# Altium PCB SPARKy watch PCB blank.PcbDoc (part 1 of 2)
Units mm, origin at the board's own origin, x right, y up, seen from the top; angles counter-clockwise.
Board outline 67 x 34.75 mm, 2 copper layers (Component Side, Bottom Layer), stack 0.325 mm thick; 94 components, 71 nets, 348 pads, 22 vias.
Unrouted connection lines stored in the file: 142.
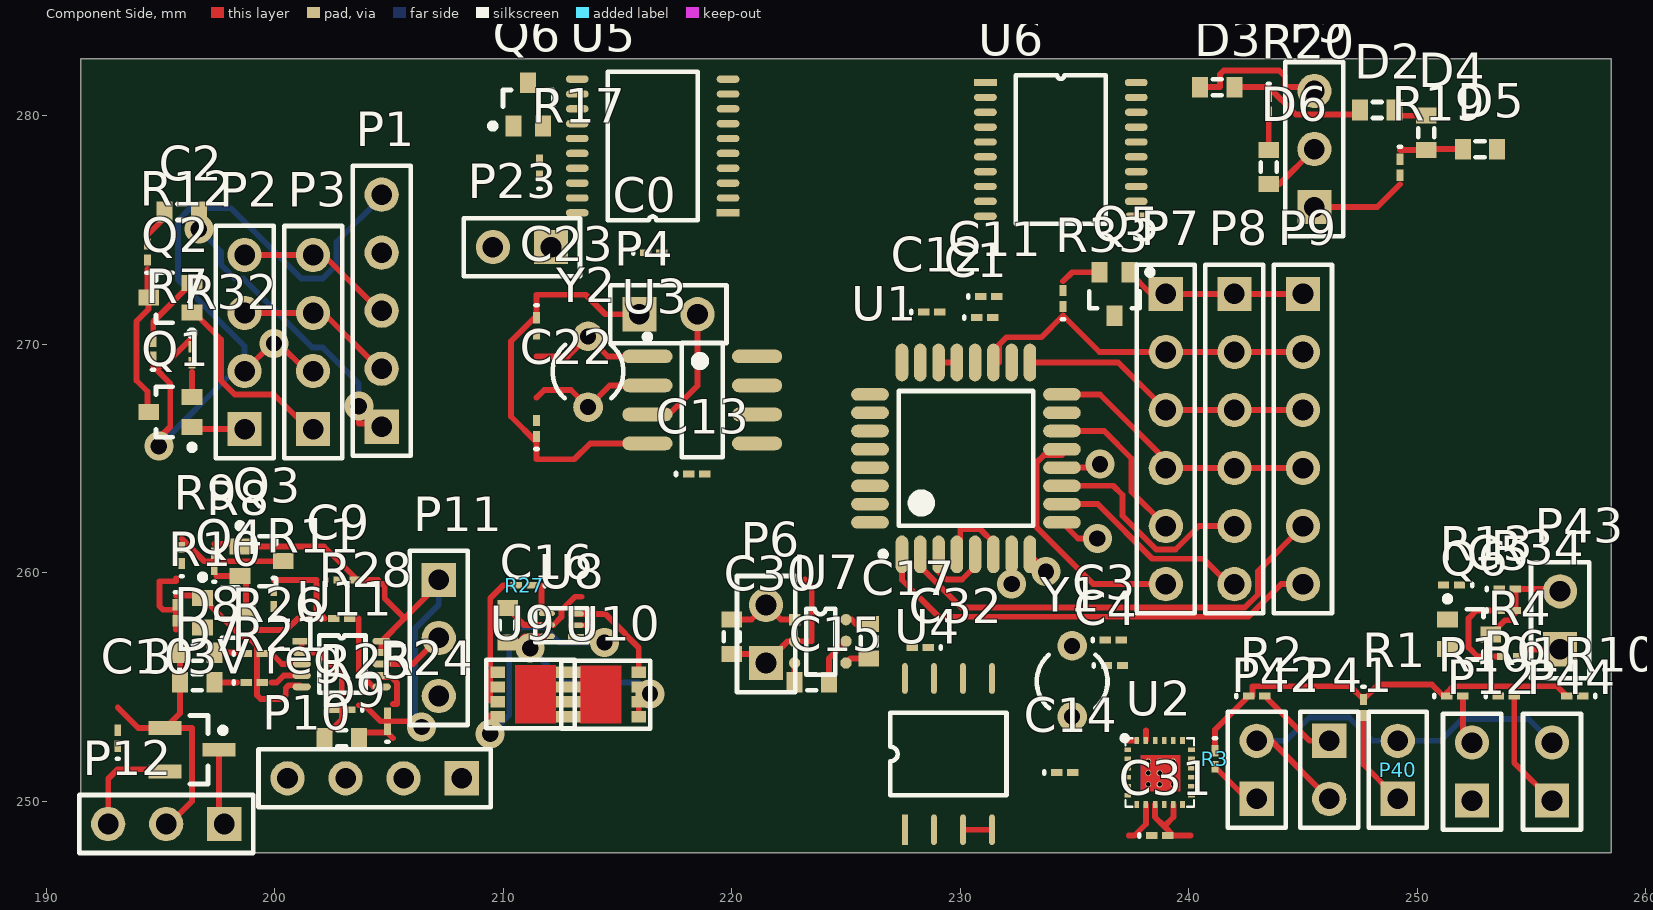
[diagram p0: Component Side view]
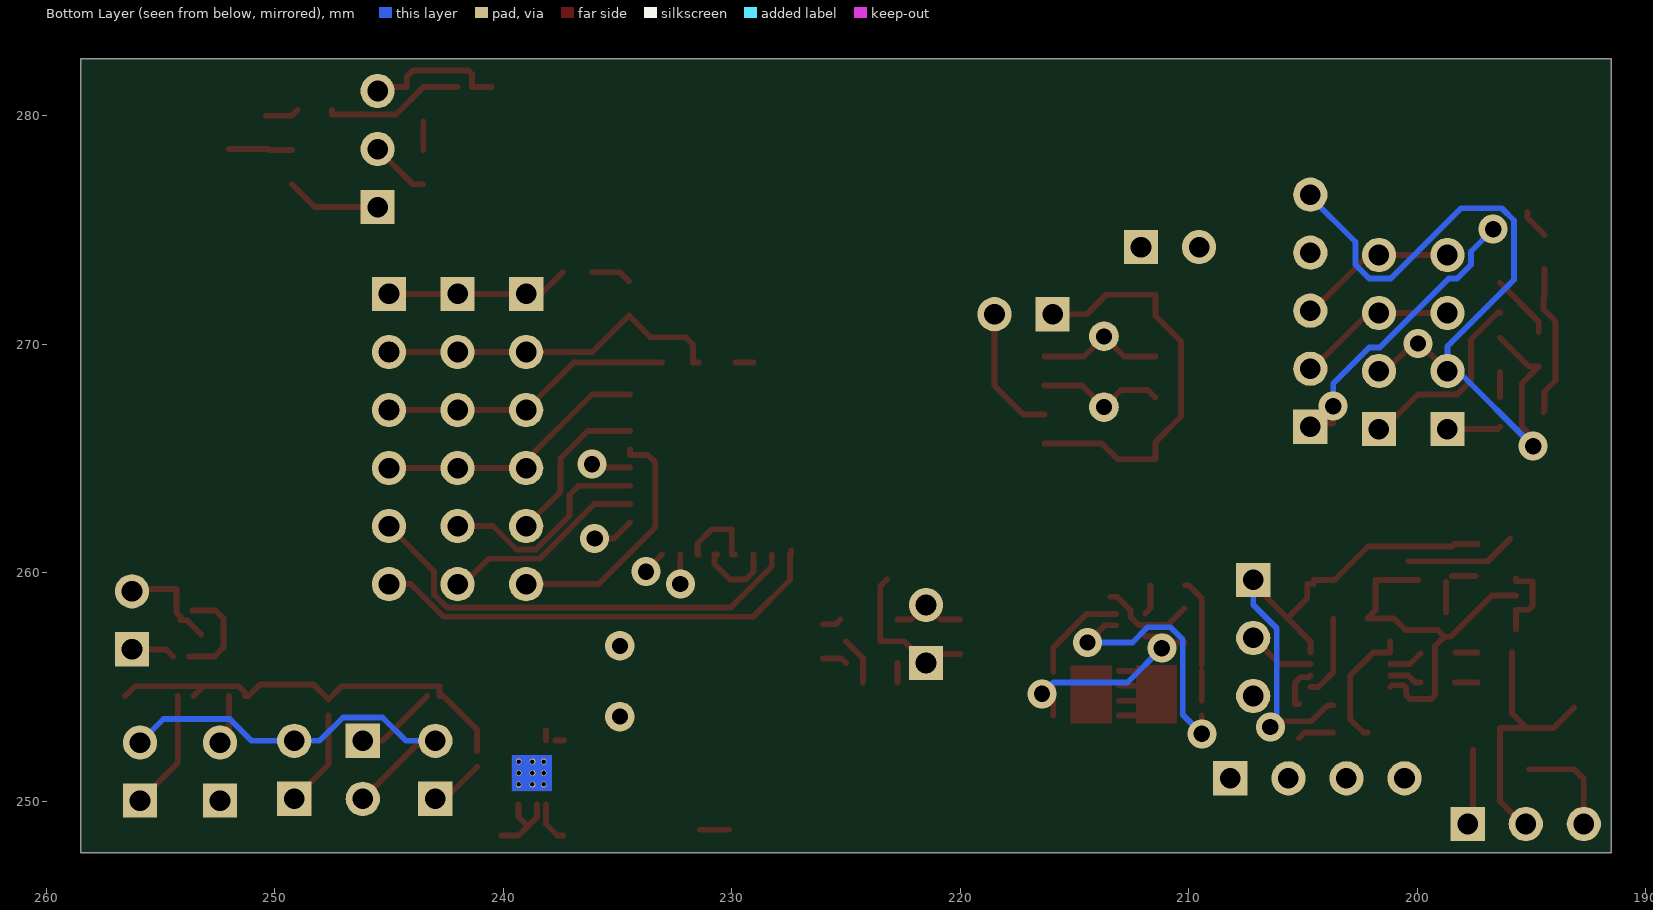
[diagram p1: Bottom Layer view, seen from below]

## Layer stack, top to bottom
Top Solder: solder mask 0.0102, Solder Resist, Dk 3.5
Component Side: signal copper 0.0356
Dielectric 1: core 0.254, FR-4, Dk 4.2
Bottom Layer: signal copper 0.0356
Solder Side: solder mask 0.0102, Solder Resist, Dk 3.5

## Board outline
191.5,247.75 191.5,282.5 258.5,282.5 258.5,247.75

## Design rules (kind name [scope] priority, off if disabled: settings)
AcuteAngle [All] p1: minimum=9.00000000000000E+0001 checktracksonly=FALSE
AssemblyTestpoint [All] p1: testpointundercomponent=TRUE minsize=1 maxsize=2.5 preferedsize=1.5 minholesize=0 maxholesize=1 preferedholesize=0.8 testpointgrid=0.025 usegrid=TRUE gridtolerance=0 allowsidetop=TRUE allowsidebottom=TRUE
Clearance "Clearance Ceramic to Board" [InComponentClass('Ceramic') vs ((ObjectKind = 'Arc') Or (ObjectKind = 'Track')) And (Layer = 'KeepOutLayer') And (Keepout = 'False')] p1: gap=4.95 // Ceramic component to board outline
Clearance [All] p2: gap=0.15
ComponentClearance [All] p1: gap=0.25 collisioncheckmode=3 verticalgap=0.25 showdistances=FALSE
DiffPairsRouting [All] p1: maxlimit=0.1 minlimit=0.1 mostfreqgap=0.1 toplayer_minwidth=0.15 toplayer_maxwidth=0.15 toplayer_prefwidth=0.15 bottomlayer_minwidth=0.15 bottomlayer_maxwidth=0.15 bottomlayer_prefwidth=0.15 maxuncoupledlength=12.7
FabricationTestpoint [All] p1: side=3 testpointundercomponent=TRUE minsize=1 maxsize=2.5 preferedsize=1.5 minholesize=0 maxholesize=1 preferedholesize=0.8 testpointgrid=0.025 allowsidetop=TRUE allowsidebottom=TRUE usegrid=TRUE gridtolerance=0
Height [All] p1: minheight=0 maxheight=50 prefheight=12.5
HoleSize [All] p1: absolutevalues=TRUE maxlimit=6.5 minlimit=0.3 maxpercent=80.000 minpercent=20.000
HoleToHoleClearance [All] p1: gap=0.25 allowstackedmicrovias=TRUE
MinimumAnnularRing [All] p1: minimumring=0.15
MinimumSolderMaskSliver [All] p1: minsoldermaskwidth=0.15
PlaneClearance [All] p1: clearance=0.5
PlaneConnect [All] p1: planeconnectstyle=Relief reliefexpansion=0.5 reliefentries=4 reliefconductorwidth=0.25 reliefairgap=0.25
PolygonConnect [All] p1: connectstyle=Relief reliefconductorwidth=0.25 reliefentries=4 polygonreliefangle="90 Angle" airgapwidth=0.25
RoutingCorners [All] p1: cornerstyle=45-Degree minsetback=2.5 maxsetback=2.5
RoutingVias [All] p1: holewidth=0.5 width=0.8 viastyle="Through Hole" minholewidth=0.3 minwidth=0.6 maxholewidth=0.7 maxwidth=1
SilkToSilkClearance [All] p1: silktosilkclearance=0.25
SilkToSolderMaskClearance [IsPad] p1: minsilkscreentomaskgap=0.25 clearancetoexposedcopper=TRUE
SolderMaskExpansion [All] p1: expansion=0.075
UnpouredPolygon [All] p1: allowunpoured=FALSE
Width [All] p1: maxlimit=1 minlimit=0.15 preferedwidth=0.2
16 further rules are at their usual default settings.

## Classes and differential pairs
component class "V stuff": R21 R24 R25 R26 R27 R28 U8 U9 U10 U11
component class "Serial devices": R7 R32
component class Screens: R33
component class RTC: U2 U3 U4 Y2
component class Prefrels: R17 R19 R20 U5 U7
component class Designator: R12 R13 U1 Y1
component class "battery sensor": R8 R9 R10 R11

## Components (designator, comment, footprint, x,y, rotation, side; value= is the part's Value field where it differs from the comment)
"3.3V reg" "Volt Reg" SOT23_M 196.377,252.25 r0 top
C0 "Cap Semi" 0603 216.589,274 r0 top
C1 "Cap Semi" 0603 231.075,271.161 r0 top
C2 "Cap" J1-0603 195.927,275.784 r180 top
C3 "Cap Semi" 0603 236.7,257.05 r0 top
C4 "Cap Semi" 0603 236.75,255.943 r0 top
C5 "Cap Semi" 0603 253.949,258.343 r0 top
C9 "Cap Semi" 0603 203.177,259.682 r0 top
C10 "Cap Semi" 0603 193.127,252.75 r90 top
C11 "Cap Semi" 0603 231.25,272.084 r0 top
C12 "Cap Semi" 0603 228.75,271.411 r0 top
C13 "Cap Semi" 0603 218.46,264.311 r0 top
C14 "Cap Semi" 0603 234.579,251.25 r0 top
C15 "Cap" J1-0603 223.5,255.196 r0 top
C16 "Cap" J1-0603 210.187,257.696 r90 top
C17 "Cap" J1-0603 226,256.995 r90 top
C22 "Cap" 0603 211.46,266.311 r90 top
C23 "Cap" 0603 211.46,270.811 r270 top
C30 "C16" J1-0603 220,257.196 r270 top
C31 "Cap Semi" 0603 238.725,248.5 r0 top
C32 "Cap Semi" 0603 228.25,256.721 r180 top
D2 "Diode" J1-0603 248.25,280.25 r0 top
D3 "Diode" J1-0603 241.25,281.25 r0 top
D4 "Diode" J1-0603 250.399,279.25 r90 top
D5 "Diode" J1-0603 252.75,278.54 r180 top
D6 "de ??" J1-0603 243.5,277.75 r270 top
D7 "FULL" J1-0603 196.602,255.196 r0 top
D8 "Chargeing" J1-0603 196.602,256.5 r0 top
D9 "power ok" J1-0603 202.927,252.75 r0 top
P1 "FTDI headder" HDR1X5 204.677,266.384 r90 top
P2 "ESP8266" HDR1X4 198.677,266.284 r90 top
P3 "RN42-1/rm" HDR1X4 201.676,266.284 r90 top
P4 "Header 2" HDR1X2 215.96,271.311 r0 top
P5 "External Port" HDR1X3 245.5,276 r90 top
P6 "Header Lasar" HDR1X2 221.5,256.045 r90 top
P7 "Screen 1" HDR1X6 239,272.199 r270 top
P8 "Screen 2" HDR1X6 242,272.199 r270 top
P9 "Screen 3" HDR1X6 245,272.199 r270 top
P10 "USB" HDR1X4 208.177,251 r180 top
P11 "battery header" HDR1X3 207.177,259.682 r270 top
P12 "V rails" HDR1X3 197.787,249 r180 top
P12 "Buzzer" HDR1X2 252.399,250.024 r90 top
P23 "LED conector" HDR1X2 212.089,274.25 r180 top
P40 "SW1 (enter)" HDR1X2 249.149,250.099 r90 top
P41 "SW2 (Escape)" HDR1X2 246.149,252.639 r270 top
P42 "SW3" HDR1X2 242.974,250.099 r90 top
P43 "SW4" HDR1X2 256.25,256.643 r90 top
P44 "SW5" HDR1X2 255.899,250.024 r90 top
Q1 "2N7000" ONSC-SOT-323-3-419-04_V 195.427,267.034 r180 top
Q2 "2N7000" ONSC-SOT-323-3-419-04_V 195.427,272.034 r180 top
Q3 "MESFET-N" ONSC-SOT-323-3-419-04_V 199.427,260.5 r0 top
Q4 "MESFET-P" ONSC-SOT-323-3-419-04_V 197.787,258.25 r0 top
Q5 "2N7000" ONSC-SOT-323-3-419-04_V 236.75,272.199 r270 top
Q6 "2N7000" ONSC-SOT-323-3-419-04_V 211.089,280.5 r90 top
Q6 "2N7000" ONSC-SOT-323-3-419-04_V 252.275,257.3 r0 top
R1 "Res1" 0603 247.649,254.099 r270 top
R2 "Res1" 0603 242.974,254.599 r0 top
R3 "Res1" 0603 241.149,251.849 r270 top
R4 "Res1" 0603 254.099,256.33 r0 top
R6 "Res1" 0603 253.899,254.599 r0 top
R7 "Res3" 0603 194.677,269.784 r90 top
R8 "Res3" 0603 197.352,260.5 r90 top
R9 "Res3" 0603 195.928,260.75 r90 top
R10 "Res3" 0603 195.677,258.25 r270 top
R11 "Res11" 0603 199.953,258.868 r270 top
R12 "Res1" 0603 194.427,274.034 r90 top
R13 "Res1" 0603 251.5,259.459 r180 top
R17 "Res1" 0603 211.589,277.7 r90 top
R19 "Res1" 0603 249.25,277.75 r270 top
R20 "Res1" 0603 243.5,280.5 r270 top
R21 "Res1" 0603 199.102,255.196 r0 top
R24 "Res1" 0603 204.927,253.5 r90 top
R25 "Res1" 0603 202.927,254 r180 top
R26 "Res1" 0603 199.102,256.466 r0 top
R27 "Res1" 0603 210.927,259.446 r180 top
R28 "Res1" 0603 202.927,258 r0 top
R32 "Res3" 0603 196.377,269.534 r270 top
R33 "Res3" 0603 234.5,272 r90 top
R34 "Res1" 0603 253.949,259.284 r0 top
R100 "Res1" 0603 256.899,254.599 r180 top
R101 "Res1" 0603 251.649,254.599 r0 top
U1 "ATmega8-16AU" 32A_N 230.25,265 r90 top
U2 "Component_1" MPU-9255 237.328,252.249 r0 top
U3 "MCP79412T-I/SN" SOIC-SN8_N 218.709,267.56 r0 top
U4 "Component_1" SOP8 227.579,248.75 r90 top
U5 "Component_1" SOP20 219.839,275.75 r180 top
U6 "Component_1" SOP20 231.1,281.45 r0 top
U7 "LTC3200" SOP6 222.749,257.945 r0 top
U8 "bq29700" DSE 213.177,257.196 r180 top
U9 "CSD16406Q3" Q3 209.75,255.646 r0 top
U10 "CSD16406Q3" Q3 215.927,253.696 r180 top
U11 "MCP73833/4" SOP10 201.177,257 r0 top
Y1 "16MHz" R38 234.899,255.25 r0 top
Y2 "32.768Mhz" R38 213.71,268.794 r180 top

## Footprints (in the part's own frame and the unit in brackets; to place one, negate y for a bottom-side part, rotate by r counter-clockwise, add the part's x,y. Pads: shape width x height; smd on the part's side, far side on the other; paste and mask are expansions set on the pad)
32A_N [mm] "Thin QFP, 32-Leads, Body 7x7mm, Pitch 0.8mm, IPC Medium Density"
  oval 1.65x0.55 smd: 1(-4.2,2.8) 2(-4.2,2) 3(-4.2,1.2) 4(-4.2,0.4) 5(-4.2,-0.4) 6(-4.2,-1.2) 7(-4.2,-2) 8(-4.2,-2.8) 17(4.2,-2.8) 18(4.2,-2) 19(4.2,-1.2) 20(4.2,-0.4) 21(4.2,0.4) 22(4.2,1.2) 23(4.2,2) 24(4.2,2.8)
  oval 0.55x1.65 smd: 9(-2.8,-4.2) 10(-2,-4.2) 11(-1.2,-4.2) 12(-0.4,-4.2) 13(0.4,-4.2) 14(1.2,-4.2) 15(2,-4.2) 16(2.8,-4.2) 25(2.8,4.2) 26(2,4.2) 27(1.2,4.2) 28(0.4,4.2) 29(-0.4,4.2) 30(-1.2,4.2) 31(-2,4.2) 32(-2.8,4.2)
  silkscreen extent -4.32,-2.95 2.95,3.75, body extent -3.5,-3.5 3.5,3.5, height 1.2
0603 [mm] "Chip Inductor, Body 0.6x0.3mm, IPC High Density"
  rect 0.5x0.3 smd: 1(-0.35,0) 2(0.35,0)
  silkscreen extent -0.9,-0.05 -0.9,0.05, body extent -0.33,-0.18 0.33,0.18, height 0.55
DSE [mm]
  rect 0.7x0.23 smd: 1(0,0)
  oval 0.7x0.23 smd: 2(0,-0.5) 3(0,-1) 4(1.27,-1.016) 5(1.27,-0.516) 6(1.27,-0.016)
  silkscreen extent -0.51,-1.25 1.78,0.25
HDR1X2 [mm] "Connector; Header; 2 Position"
  rect 1.5x1.5 hole 0.9: 1(0,0)
  round 1.5 hole 0.9: 2(2.54,0)
  silkscreen extent -1.27,-1.27 3.81,1.27
HDR1X3 [mm] "Connector; Header; 3 Position"
  rect 1.5x1.5 hole 0.9: 1(0,0)
  round 1.5 hole 0.9: 2(2.54,0) 3(5.08,0)
  silkscreen extent -1.27,-1.27 6.35,1.27
HDR1X4 [mm] "Connector; Header; 4 Position"
  rect 1.5x1.5 hole 0.9: 1(0,0)
  round 1.5 hole 0.9: 2(2.54,0) 3(5.08,0) 4(7.62,0)
  silkscreen extent -1.27,-1.27 8.89,1.27
HDR1X5 [mm] "Connector; Header; 5 Position"
  rect 1.5x1.5 hole 0.9: 1(0,0)
  round 1.5 hole 0.9: 2(2.54,0) 3(5.08,0) 4(7.62,0) 5(10.16,0)
  silkscreen extent -1.27,-1.27 11.43,1.27
HDR1X6 [mm] "Connector; Header; 6 Position"
  rect 1.5x1.5 hole 0.9: 1(0,0)
  round 1.5 hole 0.9: 2(2.54,0) 3(5.08,0) 4(7.62,0) 5(10.16,0) 6(12.7,0)
  silkscreen extent -1.27,-1.27 13.97,1.27
J1-0603 [mm] "Chip Resistor, Body 1.6x0.8mm, IPC High Density"
  rect 0.7x0.9 smd: 1(-0.75,0) 2(0.75,0)
  silkscreen extent -0.2,-0.35 0.2,0.35, body extent -0.85,-0.48 0.85,0.48, height 0.9
MPU-9255 [mm]
  rect 0.3x0.2 smd: 1(0,0) 2(0,-0.4) 3(0,-0.8) 4(0,-1.2) 5(0,-1.6) 6(0,-2) 13(2.8,-2) 14(2.8,-1.6) 15(2.8,-1.2) 16(2.8,-0.8) 17(2.8,-0.4) 18(2.8,0)
  rect 0.2x0.3 smd: 7(0.4,-2.4) 8(0.8,-2.4) 9(1.2,-2.4) 10(1.6,-2.4) 11(2,-2.4) 12(2.4,-2.4) 19(2.4,0.4) 20(2,0.4) 21(1.6,0.4) 22(1.2,0.4) 23(0.8,0.4) 24(0.4,0.4)
  Component Side region: 0.552,-1.817 2.302,-1.817 2.302,-0.227 0.552,-0.227
  Bottom Layer region: 0.549,-1.812 2.299,-1.812 2.299,-0.222 0.549,-0.222
  silkscreen extent -0.23,-2.5 2.9,0.61
ONSC-SOT-323-3-419-04_V [mm] "SOT23, 3-Leads, Body 2x1.25mm, Pitch 0.65mm"
  rect 0.9x0.7 smd: 1(-0.95,0.65) 2(-0.95,-0.65) 3(0.95,0)
  silkscreen extent -1.08,-1.1 0.63,1.67, body extent -0.63,-1 0.63,1, height 1
Q3 [mm]
  rect 0.63x0.5 smd: 1(0,0) 2(0,-0.65) 3(0,-1.3) 4(0,-1.95) 5(2.87,-1.95) 6(2.87,-1.3) 7(2.87,-0.65) 8(2.87,0)
  Component Side region: 0.76,-2.246 2.56,-2.246 2.56,0.304 0.76,0.304
  silkscreen extent -0.5,-2.45 3.38,0.53
R38 [mm] "Crystal, Thru-Hole; 2 Leads; Body 3.1 x 8.2 mm (Dia.xH)"
  round 1.3 hole 0.7: 1(0,1.55) 2(0,-1.55)
  silkscreen extent -1.55,-1.19 1.55,1.17
SOIC-SN8_N [mm] "SOIC, 8-Leads, Body 4.9x3.8mm, Pitch 1.27mm, IPC Medium Density"
  oval 2.2x0.6 smd: 1(-2.4,1.905) 2(-2.4,0.635) 3(-2.4,-0.635) 4(-2.4,-1.905) 5(2.4,-1.905) 6(2.4,-0.635) 7(2.4,0.635) 8(2.4,1.905)
  silkscreen extent -2.52,-2.5 0.9,2.88, body extent -2,-2.5 2,2.5, height 1.75
SOP6 [mm]
  rect 0.5x0.5 smd: 1(0,0)
  round 0.5 smd: 2(0,-0.95) 3(0,-1.9) 4(2.25,-1.9) 5(2.25,-0.95) 6(2.25,0)
  silkscreen extent 0.51,-2.41 1.78,0.48
SOP8 [mm]
  rect 1.345x0.25 smd: 1(0,0)
  oval 1.345x0.25 smd: 2(0,-1.27) 3(0,-2.54) 4(0,-3.81) 5(6.62,-3.81) 6(6.62,-2.54) 7(6.62,-1.27) 8(6.62,0)
  silkscreen extent 1.51,-4.45 5.11,0.64
SOP10 [mm]
  rect 0.8x0.3 smd: 1(0,0)
  oval 0.8x0.3 smd: 2(0,-0.5) 3(0,-1) 4(0,-1.5) 5(0,-2) 6(3.5,-2) 7(3.5,-1.5) 8(3.5,-1) 9(3.5,-0.5) 10(3.5,0)
  silkscreen extent 0.76,-2.25 2.79,0.25
SOP20 [mm]
  rect 1x0.32 smd: 1(0,0)
  oval 1x0.32 smd: 2(0,-0.65) 3(0,-1.3) 4(0,-1.95) 5(0,-2.6) 6(0,-3.25) 7(0,-3.9) 8(0,-4.55) 9(0,-5.2) 10(0,-5.85) 11(6.6,-5.85) 12(6.6,-5.2) 13(6.6,-4.55) 14(6.6,-3.9) 15(6.6,-3.25) 16(6.6,-2.6) 17(6.6,-1.95) 18(6.6,-1.3) 19(6.6,-0.65) 20(6.6,0)
  silkscreen extent 1.34,-6.17 5.26,0.33
SOT23_M [mm] "SOT23, 3-Leads, Body 2.9x1.3mm, Pitch 0.95mm, Lead Span 2.3mm - Reverse Pinning, IPC Low Density"
  rect 1.45x0.6 smd: 1(1.175,0) 2(-1.175,-0.95) 3(-1.175,0.95)
  silkscreen extent -0.1,-1.5 1.48,1.5, body extent -0.7,-1.5 0.7,1.5, height 1.1

## Part data
"3.3V reg": "Voltage Regulator"
C0 C1 C3 C4 C5 C9 C10 C11 C12 C13 C14 C31 C32: "Capacitor (Semiconductor SIM Model)"
C2 C15 C16 C17 C22 C23: "Capacitor"
C30: library part Cap, "Capacitor"
D2 D3 D4 D5: "Default Diode"
D6: library part Diode, "Default Diode"
D7 D8 D9: library part LED1, "Typical RED GaAs LED"
P1: library part "Header 5", "Header, 5-Pin"
P2 P3 P10: library part "Header 4", "Header, 4-Pin"
P4: "Header, 2-Pin"
P5 P11 P12: library part "Header 3", "Header, 3-Pin"
P6 P12 P23 P40 P41 P42 P43 P44: library part "Header 2", "Header, 2-Pin"
P7 P8 P9: library part "Header 6", "Header, 6-Pin"
Q1 Q2 Q5 Q6 Q6: "Small Signal MOSFET, 200 mA, 60 V, N-Channel, 3-Pin TO-92, Bulk Box"
Q3: "N-Channel MESFET"
Q4: "P-Channel MESFET"
R1 R2 R3 R4 R6 R7 R8 R9 R10 R12 R13 R17 R19 R20 R21 R24 R25 R26 R27 R28 R32 R33 R34 R100 R101: "Resistor"
R11: library part Res3, "Resistor"
U1: "8-bit AVR Microcontroller, 4.5-5.5V, 16MHz, 8KB Flash, 512 Bytes EEPROM, 1KB SRAM, 32-pin TQFP, Industrial Grade (-40°C to 85°C)"
U3: "I2C Real-Time Clock/Calendar with EEPROM, SRAM, Unique ID and Battery Switchover, 8-Pin SOIC, Industrial Temperature, Tape and Reel"
U7 U8 U9 U10 U11: library part Component_1
Y1 Y2: library part XTAL, "Crystal Oscillator"

## Via types
v1: diameter 1.27, hole 0.711, Component Side to Bottom Layer, 13 vias
v2: diameter 0.25, hole 0.2, Component Side to Bottom Layer, 9 vias

## Nets (pads, with @x,y where several pads share a name; then routed paths per layer and width w, separated by ;. In a path a pad name is that pad's centre, name@x,y a point inside that pad or via, vN(x,y) a via of type N, cw(c..) or ccw(c..) an arc to the next point about the centre after c; other vN are vias at no path point)
3.3V: "3.3V reg.3" C0.2 C5.2 C10.2 C11.2 C12.2 C13.2 C31.1 C32.2 D7.1 D8.1 P12.2@195.247,249 P40.2 P41.2 P42.2 P43.2 P44.2 Q1.3 Q2.3 Q6.3@253.225,257.3 R12.1 R13.2 R34.2 U1.4 U1.6 U1.18 U2.1 U2.8 U2.13 U2.22 U3.8 U4.8 U5.5 U6.5 U6.6 | length 47.4
  Component Side w0.254: 193.127,254.1 194.027,253.2 195.202,253.2 ; 194.427,273.284 194.427,272.084 Q2.3@194.477,272.034 194.477,271.526 193.95,270.999 193.95,268.407 194.427,267.93 194.427,267.084 Q1.3@194.477,267.034 ; P12.2@195.247,249 195.377,249 196.377,250 196.377,253.2 195.202,253.2 ; D8.1@195.852,256.5 D7.1@195.852,255.196 195.852,253.85 195.202,253.2 ; U1.4@229.85,260.8 229.998,260.8 229.998,261.902 230.879,261.902 231.5,261.281 231.5,260.8 U1.6@231.45,260.8 ; 237.375,248.5 237.628,248.5 238.128,249 U2.8@238.128,249.849 ; P42.2@242.974,252.639 243.609,252.639 P41.2@246.149,250.099 ; Q6.3@253.225,257.3 253.841,257.916 254.124,257.916 254.124,258.076 254.299,258.251 C5.2@254.299,258.343 R34.2@254.299,259.284 256.149,259.284 P43.2@256.25,259.183
  Bottom Layer w0.254: P42.2@242.974,252.639 244.257,252.639 245.284,253.666 247.014,253.666 248.041,252.639 P40.2@249.149,252.639 251.022,252.639 251.974,253.591 254.872,253.591 P44.2@255.899,252.564
GND: "3.3V reg.2" C0.1 C1.1 C3.1 C4.1 C5.1 C9.1 C10.1 C11.1 C12.1 C13.1 C14.1 C22.1 C23.1 C30.2 C31.2 C32.1 D3.1 D5.1 P1.5 P2.2 P3.2 P4.1 P5.3 P6.1 P7.2 P8.2 P9.2 P10.1 P12.3 P23.2 Q4.1 R1.1 R2.1 R3.1 R4.1 R6.1 R7.1 R10.1 R11.1 R17.1 R27.2 R28.1 R32.1 R33.1 R100.2 R101.1 U1.3 U1.5 U1.19 U1.21 U1.22 U2.9 U2.11 U2.18 U2.20 U3.4 U4.3 U4.4 U4.7 U5.6 U5.7 U5.9 U5.15 U6.7 U6.9 U6.13 U7.2 U9.1 U9.2 U9.3 U11.5 | length 140.9
  Component Side w0.254: P12.3@192.707,249 192.707,250.98 193.127,251.4 195.102,251.4 ; v1(194.927,265.534) 194.927,265.884 195.427,266.384 195.427,268.284 194.677,269.034 195.127,269.034 196.377,270.284 ; 195.677,259 Q4.1@196.737,259 ; Q4.1@196.837,258.9 198.544,257.193 198.817,257.193 ; P2.2@198.677,268.824 199.887,270.034 200.177,270.034 201.387,268.824 P3.2@201.676,268.824 ; 199.953,259.682 201.827,259.682 ; U11.5@201.177,255 201.104,255.073 200.608,255.073 200.479,254.944 200.479,254.632 200.317,254.469 199.387,254.469 199.225,254.632 199.225,256.785 198.817,257.193 ; 201.826,259.5 201.826,258.351 202.177,258 201.027,258 200.518,257.491 199.114,257.491 198.817,257.193 ; 209.427,254.396 209.427,255.696 ; 209.427,255.946 209.427,258.879 209.995,259.446 210.177,259.446 ; P4.1@215.96,271.311 214.46,271.311 213.61,272.161 211.46,272.161 211.46,271.253 210.333,270.126 210.333,266.834 211.46,265.707 211.46,264.961 213.11,264.961 213.804,265.655 U3.4@216.309,265.655 ; C30.2@220,256.446 221.099,256.446 P6.1@221.5,256.045 222.45,256.995 U7.2@222.749,256.995 223.5,256.995 223.5,259.406 223.21,259.696 ; U1.3@229.05,260.8 229.05,260.041 229.393,259.698 230.079,259.698 230.75,260.369 230.75,260.8 U1.5@230.65,260.8 ; U1.22@229.05,269.2 U1.21@229.85,269.2 ; U4.3@230.119,248.75 U4.4@231.389,248.75 ; U1.19@231.45,269.2 231.698,269.2 231.698,269.979 232.021,270.302 233.552,270.302 234.5,271.25 236.091,269.659 P7.2@239,269.659 P8.2@242,269.659 P9.2@245,269.659 ; U2.9@238.528,249.849 238.528,249.301 238.928,248.9 ; U2.11@239.328,249.849 239.328,249.304 238.928,248.904 238.928,248.9 ; 240.075,248.5 239.329,248.5 238.928,248.9 ; D3.1@240.5,281.25 241.373,281.25 241.373,281.815 241.535,281.977 243.965,281.977 244.227,281.715 244.227,281.25 245.33,281.25 P5.3@245.5,281.08 ; R3.1@241.149,252.199 241.149,253.124 R2.1@242.624,254.599 242.797,254.599 242.797,255.026 247.072,255.026 R1.1@247.649,254.449 248.299,255.099 250.649,255.099 251.149,254.599 R101.1@251.299,254.599 251.299,254.749 251.576,255.026 253.122,255.026 ; R6.1@253.549,254.599 253.122,255.026 ; C5.1@253.599,258.343 252.592,258.343 252.25,258.001 252.25,256.721 252.641,256.33 R4.1@253.749,256.33 ; R100.2@256.549,254.599 256.122,255.026 253.122,255.026
  Bottom Layer w0.254: v1(194.927,265.534) 198.217,268.824 P2.2@198.677,268.824 198.677,269.912 195.765,272.824 195.765,275.412 196.299,275.946 198.087,275.946 201.157,272.877 202.102,272.877 202.703,273.478 202.703,274.47 P1.5@204.677,276.444
  other v1: 199.964,270.034
NetC1_2: C1.2 U1.20
NetC2_1: C2.1 P1.1 | length 13.7
  Component Side w0.254: 203.677,266.534 204.426,266.534 v1(203.677,267.284) 203.677,266.534
  Bottom Layer w0.254: v1(196.677,275.034) 197.65,274.061 197.65,273.479 198.252,272.877 198.616,272.877 201.643,269.851 202.102,269.851 203.677,268.276 v1(203.677,267.284)
NetC2_2: C2.2 R12.2 U1.29 | length 1.3
  Component Side w0.254: 194.427,274.784 195.177,275.534 C2.2@195.177,275.784
NetC3_2: C3.2 U1.8 Y1.1 | length 1
  Component Side w0.254: U1.8@233.05,260.8 233.75,260.1 v1(233.75,260.041)
NetC4_2: C4.2 U1.7 Y1.2 | length 1.3
  Component Side w0.254: v1(232.25,259.5) U1.7@232.25,260.8
NetC14_2: C14.2 U2.10
NetC15_1: C15.1 U5.17 U7.3 | length 0.8
  Component Side w0.254: C15.1@222.75,255.196 U7.3@222.749,256.045
NetC16_1: C16.1 P11.3 U8.6 U10.1 U10.2 U10.3 | length 9.2
  Component Side w0.254: C16.1@210.187,256.946 210.677,256.946 210.943,257.212 U8.6@211.907,257.212 ; U10.1@215.927,253.746 U10.3@215.927,254.996 U10.3@215.927,255.046
  Bottom Layer w0.254: v1(211.177,256.696) 212.677,255.196 215.927,255.196 v1(216.427,254.696)
NetC16_2: C16.2 R25.2 U8.5 | length 4.2
  Component Side w0.254: C16.2@210.187,258.446 210.921,257.712 U8.5@211.907,257.712 212.196,257.712 212.55,258.066 212.55,258.359 213.138,258.946 213.427,258.946
NetC17_1: C17.1 U7.4 | length 1.1
  Component Side w0.254: U7.4@224.999,256.045 225.199,256.245 C17.1@226,256.245
NetC17_2: C17.2 U7.6 | length 0.8
  Component Side w0.254: 225.25,257.946 225.451,257.745 C17.2@226,257.745
NetC22_2: C22.2 U3.2 Y2.1 | length 5.7
  Component Side w0.254: 211.46,267.661 211.792,267.993 212.961,267.993 Y2.1@213.71,267.244 214.661,268.195 U3.2@216.309,268.195
NetC23_2: C23.2 U3.1 Y2.2 | length 5.6
  Component Side w0.254: 211.46,269.461 212.827,269.461 Y2.2@213.71,270.344 214.589,269.465 U3.1@216.309,269.465
NetC30_1: C30.1 P6.2 U7.1 | length 3.3
  Component Side w0.254: C30.1@220,257.946 220.861,257.946 P6.2@221.5,258.585 222.14,257.945 U7.1@222.749,257.945
NetD2_1: D2.1 D3.2 R20.1 U1.9 | length 8
  Component Side w0.254: U1.9@234.45,262.2 235.15,261.5 v1(236,261.5) ; D3.2@242,281.25 243.5,281.25 244.697,280.053 247.5,280.053 D2.1@247.5,280.25
NetD4_1: D4.1 D5.2 R19.1 U1.26 | length 2.8
  Component Side w0.254: 249.25,278.5 250.25,278.5 250.29,278.54 D5.2@252,278.54
NetD6_1: D6.1 R20.2 | length 1.2
  Component Side w0.254: D6.1@243.5,278.5 243.5,279.75
NetD6_2: D6.2 P5.2 | length 2.6
  Component Side w0.254: D6.2@243.5,277 243.96,277 P5.2@245.5,278.54
NetD7_2: D7.2 R21.1 | length 1
  Component Side w0.254: D7.2@197.352,255.196 198.352,255.196
NetD8_2: D8.2 R26.1 | length 1
  Component Side w0.254: D8.2@197.352,256.5 198.318,256.5
NetD9_1: D9.1 P10.4 U11.1 U11.2 | length 5.6
  Component Side w0.254: U11.1@201.177,257 U11.2@201.177,256.5 201.927,256.5 202.927,255.5 202.927,253.575 202.352,253 D9.1@202.177,253
NetD9_2: D9.2 R24.1 | length 1.6
  Component Side w0.254: D9.2@203.677,253 204.927,253 205.177,252.75
NetP1_2: P1.2 P2.3 P3.3 U1.30 | length 7.1
  Component Side w0.254: P2.3@198.678,271.364 P3.3@201.676,271.364 202.137,271.364 P1.2@204.677,268.824
NetP1_3: P1.3 P2.4 P3.4 U1.31 | length 7.1
  Component Side w0.254: P2.4@198.677,273.904 P3.4@201.676,273.904 ; P3.4@201.676,273.904 202.137,273.904 P1.3@204.677,271.364
NetP2_1: P2.1 Q1.1 | length 2.3
  Component Side w0.254: Q1.1@196.377,266.384 196.477,266.284 P2.1@198.677,266.284
NetP3_1: P3.1 Q2.1 | length 8.5
  Component Side w0.254: Q2.1@196.377,271.384 196.469,271.384 197.65,270.203 197.65,268.399 198.252,267.797 199.964,267.797 201.478,266.284 P3.1@201.676,266.284
NetP4_2: P4.2 U3.3 | length 5.8
  Component Side w0.254: U3.3@216.309,266.925 217.241,266.925 218.5,268.184 P4.2@218.5,271.311
NetP5_1: P5.1 R19.2 | length 4.2
  Component Side w0.254: P5.1@245.5,276 248.25,276 249.25,277
NetP7_1: P7.1 P8.1 P9.1 Q5.1 | length 8
  Component Side w0.254: Q5.1@237.4,273.149 238.35,272.199 P7.1@239,272.199 P8.1@242,272.199 P9.1@245,272.199
NetP7_3: P7.3 P8.3 P9.3 U1.17 U4.6 | length 12.8
  Component Side w0.254: U1.17@233.05,269.2 236.919,269.2 P7.3@239,267.119 P9.3@245,267.119
NetP7_4: P7.4 P8.4 P9.4 U1.16 U4.5 | length 12.1
  Component Side w0.254: U1.16@234.45,267.8 236.119,267.8 239,264.919 P7.4@239,264.579 P8.4@242,264.579 P9.4@245,264.579
NetP7_5: P7.5 U1.14 | length 7.1
  Component Side w0.254: U1.14@234.45,266.2 236.3,266.2 237.5,265 237.5,263.539 P7.5@239,262.039
NetP7_6: P7.6 U1.13 | length 11.2
  Component Side w0.254: U1.13@234.45,265.4 234.45,265.152 233.671,265.152 233.348,264.829 233.348,261.971 235.821,259.499 P7.6@239,259.499
  Bottom Layer w0.254: P7.6@239,259.499 P7.6@239.222,259.499
NetP8_5: P8.5 U1.11 | length 9.7
  Component Side w0.254: U1.11@234.45,263.8 236.7,263.8 237.096,263.404 237.096,262.49 238.575,261.012 239.425,261.012 240.452,262.039 P8.5@242,262.039
NetP8_6: P8.6 U1.25 | length 9
  Component Side w0.254: 234.45,263 236.015,263 238.407,260.608 240.642,260.608 241.751,259.499 P8.6@242,259.499
NetP9_5: P9.5 U1.2 | length 20.1
  Component Side w0.254: U1.2@228.25,260.8 228.25,260.269 230.048,258.472 242.452,258.472 243.027,259.046 243.027,260.066 P9.5@245,262.039
NetP9_6: P9.6 R13.1 U1.1 U3.7 | length 20.1
  Component Side w0.254: U1.1@227.398,260.829 U1.1@227.398,260.983 ; U1.1@227.45,260.8 227.45,259.681 229.064,258.068 242.62,258.068 244.051,259.499 P9.6@245,259.499
NetP11_2: P11.2 U11.8 | length 3
  Component Side w0.254: U11.8@204.677,256 206.035,256 P11.2@207.177,257.142
NetP12_1: P12.1@252.399,250.024 Q6.1@251.325,257.95
NetP12_2: P12.2@252.399,252.564 R101.2 | length 2.2
  Component Side w0.254: R101.2@251.999,254.599 251.999,252.964 P12.2@252.399,252.564
NetP23_1: P23.1 Q6.1@210.439,279.55
NetP40_1: P40.1 R1.2 U6.17 | length 4.3
  Component Side w0.254: R1.2@247.649,253.749 247.649,251.599 P40.1@249.149,250.099
NetP41_1: P41.1 R2.2 U6.16 | length 3.6
  Component Side w0.254: R2.2@243.324,254.599 245.284,252.639 P41.1@246.149,252.639
NetP42_1: P42.1 R3.2 U6.14 | length 2.4
  Component Side w0.254: R3.2@241.149,251.499 242.549,250.099 P42.1@242.974,250.099
NetP43_1: P43.1 R4.2 U6.12 | length 1.9
  Component Side w0.254: R4.2@254.449,256.33 254.762,256.643 P43.1@256.25,256.643
NetP44_1: P44.1 R6.2 U6.11 | length 5.3
  Component Side w0.254: R6.2@254.249,254.599 254.249,251.674 P44.1@255.899,250.024
NetQ1_2: Q1.2 R32.2 U5.11 | length 1.1
  Component Side w0.254: Q1.2@196.377,267.684 196.377,268.784
NetQ2_2: Q2.2 R7.2 U5.12 | length 2.9
  Component Side w0.254: 194.677,270.534 194.677,270.984 Q2.2@196.377,272.684
NetQ3_2: Q3.2 Q4.3 R8.1 | length 2.4
  Component Side w0.254: 197.452,259.85 Q3.2@198.477,259.85 ; Q4.3@198.737,258.25 Q3.2@198.737,259.59
NetQ3_3: Q3.3 R9.2 | length 4.9
  Component Side w0.254: 195.928,261.5 195.928,261.482 196.91,260.5 Q3.3@200.377,260.5
NetQ4_2: Q4.2 R11.2 U5.20
NetQ5_2: Q5.2 R33.2 U5.16 | length 1.8
  Component Side w0.254: 234.5,272.75 234.899,273.149 Q5.2@236.1,273.149
NetQ6_2: Q6.2@211.739,279.55 R17.2 U5.14
NetR9_1: R9.1 R10.2 U1.24 | length 3.6
  Component Side w0.254: 195.677,257.5 195.677,258.373 195.112,258.373 194.95,258.535 194.95,259.627 195.677,259.627 195.677,259.749
NetR21_2: R21.2 U6.20 U11.4 | length 1.5
  Component Side w0.254: 199.852,255.196 200.088,255.196 200.391,255.5 U11.4@201.177,255.5
NetR24_2: R24.2 U11.7 | length 1.9
  Component Side w0.254: U11.7@204.677,255.5 204.75,255.427 205.104,255.427 205.354,255.177 205.354,254.25 205.177,254.25
NetR26_2: R26.2 U6.19 U11.3 | length 1.5
  Component Side w0.254: 199.852,256.466 200.318,256 U11.3@201.177,256
NetR27_1: R27.1 U8.4 | length 1.3
  Component Side w0.254: 211.677,259.446 211.677,258.442 U8.4@211.907,258.212
NetR28_2: R28.2 U11.6 | length 3.6
  Component Side w0.254: 203.677,258 203.677,255.646 204.323,255 U11.6@204.677,255
NetR34_1: R34.1 U1.32 U6.1
NetR37_1: U1.28 U2.23 U3.6 U5.2 U6.2 | length 0.5
  Component Side w0.254: U2.23@238.128,252.649 238.128,253.1
NetR38_1: U1.27 U2.24 U3.5 U5.4 U6.4 | length 0.4
  Component Side w0.254: 237.329,252.649 U2.24@237.724,252.649
NetU1_12: U1.12 U4.1 | length 1.7
  Component Side w0.254: U1.12@234.45,264.6 235.969,264.6 v1(236.119,264.75)
NetU1_15: U1.15 U4.2
NetU2_12: U2.12 U6.10
NetU8_2: U8.2 U9.4 | length 11.5
  Component Side w0.254: v1(209.427,252.946) 209.427,253.696 209.427,253.746 ; U8.2@213.177,257.696 213.677,257.696 v1(214.427,256.946)
  Bottom Layer w0.254: v1(209.427,252.946) 210.265,253.784 210.265,257.074 210.799,257.608 211.801,257.608 212.463,256.946 v1(214.427,256.946)
NetU8_3: U8.3 U10.4 | length 4.4
  Component Side w0.254: U8.3@213.177,258.196 214.467,258.196 215.339,257.324 215.339,257.3 215.927,256.712 U10.4@215.927,255.646
NetU9_5: U9.5 U9.6 U9.7 U9.8 U10.5 U10.6 U10.7 U10.8 | length 3
  Component Side w0.254: 212.297,253.746 U10.8@213.057,253.746 ; 212.297,254.396 U10.7@213.057,254.396 ; 212.297,255.046 U10.6@213.057,255.046 ; 212.297,255.696 U10.5@213.057,255.696